# Altium PCB TestProject PCB V2.PcbDoc (part 2 of 2)
Units mil, origin at the board's own origin, x right, y up, seen from the top; angles counter-clockwise.
Board outline 2300 x 2780 mil, 2 copper layers (Top Layer, Bottom Layer), stack 61.811 mil thick; 69 components, 57 nets, 259 pads, 819 vias.
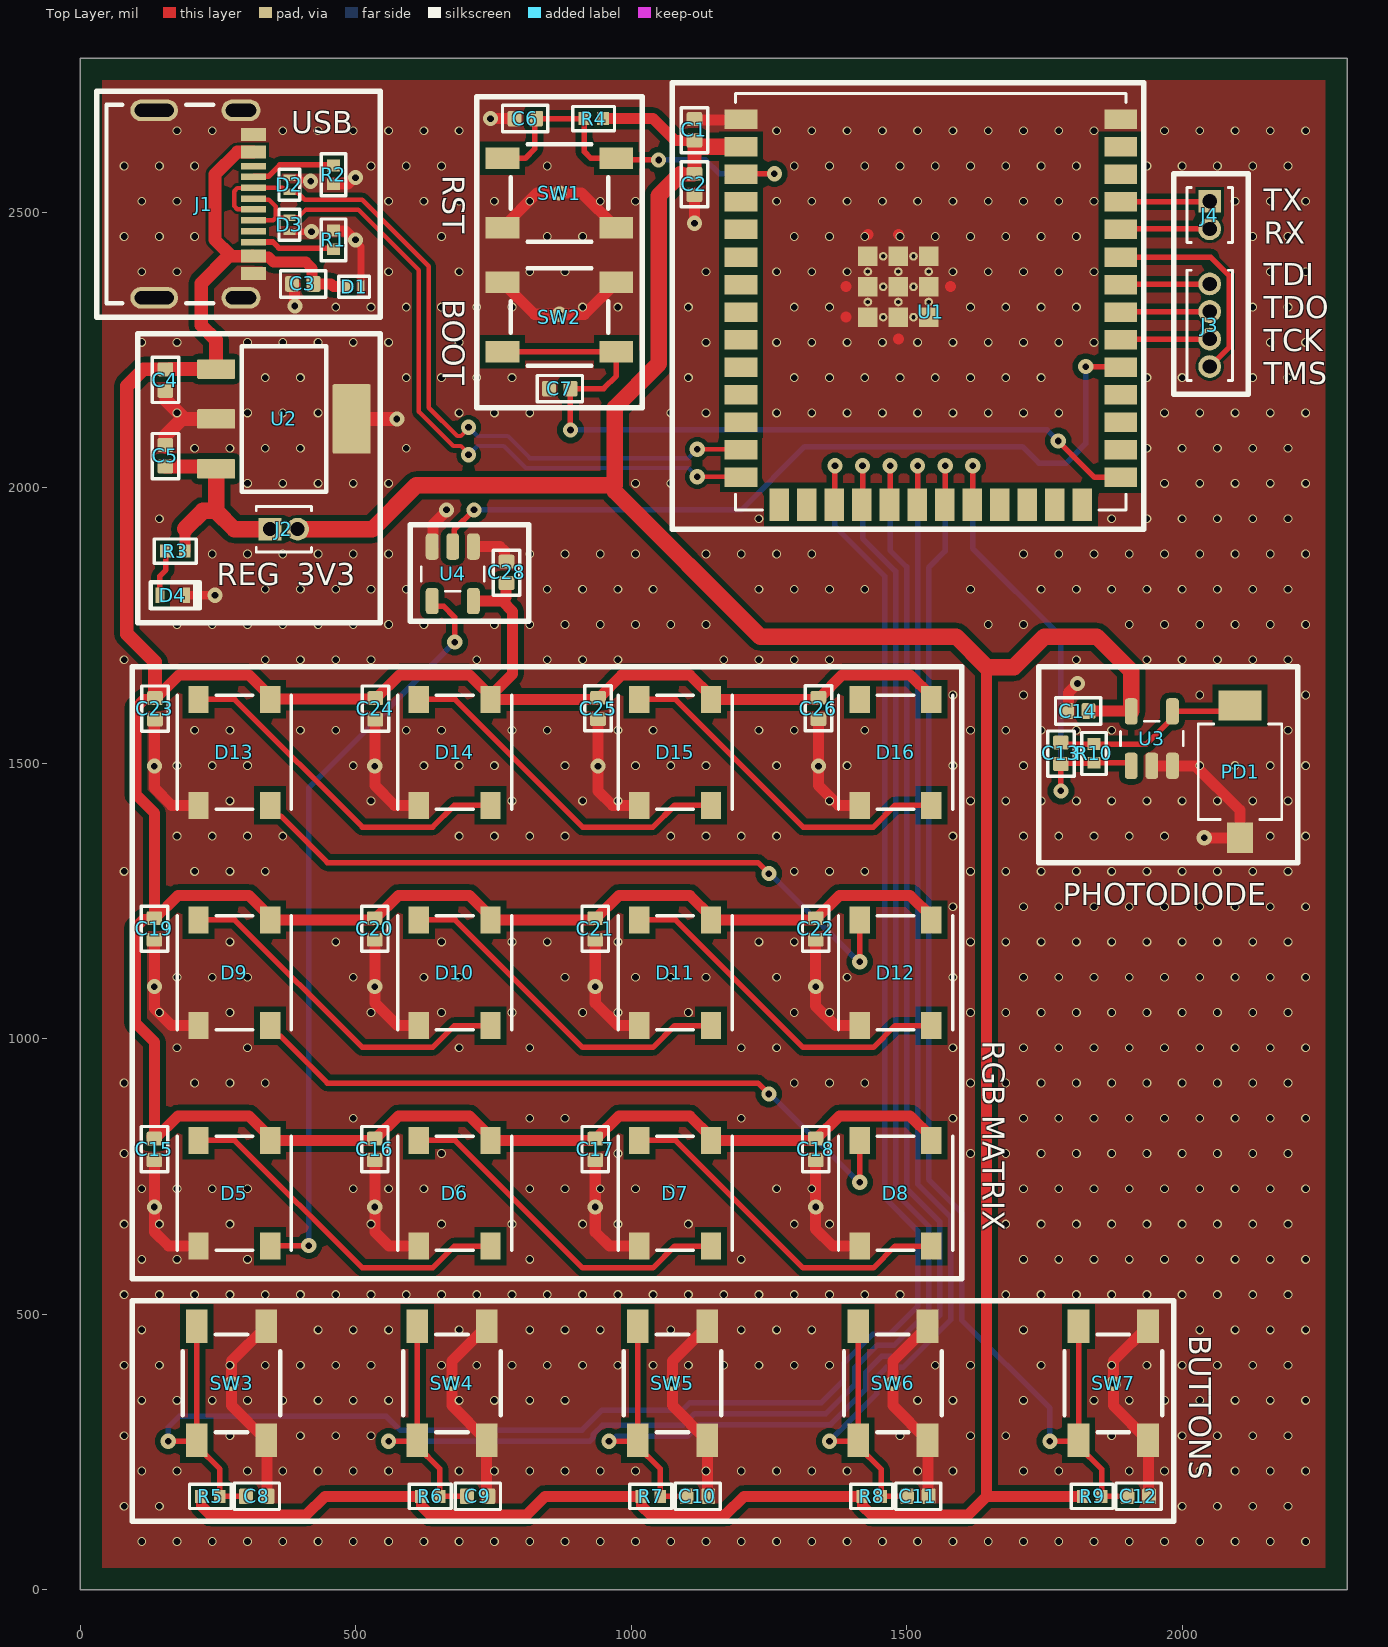
[diagram p0: Top Layer view]

## Via types
v1: diameter 16, hole 12, Top Layer to Bottom Layer, tented both sides, 760 vias
v2: diameter 27.56, hole 12, Top Layer to Bottom Layer, tented both sides, 59 vias

## Nets (pads, with @x,y where several pads share a name; then routed paths per layer and width w, separated by ;. In a path a pad name is that pad's centre, name@x,y a point inside that pad or via, vN(x,y) a via of type N, cw(c..) or ccw(c..) an arc to the next point about the centre after c; other vN are vias at no path point) (continued)
+5V: (continued)
  Top Layer w20: C15.2@130.83,823.17 130.83,821.6 133.43,819 C15.2 135,994.57 100.83,1028.74 100.83,1201.71 115.51,1216.4 132.4,1216.4 C19.2 ; C19.2@133.43,1219 135,1220.57 135,1410 101.22,1443.78 101.22,1600.61 116.51,1615.9 133.4,1615.9 C23.2 ; C15.2@136.57,819 178.07,860.5 306.46,860.5 344.96,822 D5.1 530.43,816 533.43,819 C16.2 536.57,819 578.07,860.5 706.46,860.5 744.96,822 D6.1 930.43,816 933.43,819 C17.2 936.57,819 978.07,860.5 1106.46,860.5 1144.96,822 D7.1 1330.43,816 1333.43,819 C18.2 1336.57,819 1378.07,860.5 1506.46,860.5 1544.96,822 D8.1 ; C19.2@136.57,1219 178.07,1260.5 306.46,1260.5 344.96,1222 D9.1 530.43,1216 533.43,1219 C20.2 536.57,1219 578.07,1260.5 706.46,1260.5 744.96,1222 D10.1 930.43,1216 933.43,1219 C21.2 936.57,1219 978.07,1260.5 1106.46,1260.5 1144.96,1222 D11.1 1330.43,1216 1333.43,1219 C22.2 1336.57,1219 1378.07,1260.5 1506.46,1260.5 1544.96,1222 D12.1 ; C23.2@137.57,1618.5 179.57,1660.5 306.46,1660.5 344.96,1622 D13.1 346.21,1617.25 534.75,1617.25 C24.2 537.57,1618.5 579.57,1660.5 706.46,1660.5 D14.1@744.96,1622 ; J1.B4A9@313.29,2422.06 J1.B4A9 316.65,2418.7 342.05,2418.7 350.75,2410 409.69,2410 421.4,2398.28 421.4,2372.6 C3.2 455,2370 460,2365 D1.2@480,2365 ; U4.5 766.31,1794.5 ; C28.2 772.73,1825.73 772.73,1800.92 766.31,1794.5 ; D16.1 1544.96,1622 1506.46,1660.5 1383.07,1660.5 1341.57,1619 C26.2 1338.43,1619 1335.43,1616 D15.1 1144.96,1622 1106.46,1660.5 983.07,1660.5 941.57,1619 C25.2 938.43,1619 935.43,1616 D14.1 D14.1@744.96,1622 ; D14.1@744.96,1622 785,1662.04 785,1775.81 766.31,1794.5
  Top Layer w23: 269.57,2420.51 J1.B4A9 ; 271.13,2423.87 245,2450 245,2568.98 285.51,2609.49 J1.A4B9
  Top Layer w25: C23.2 136,1684 85,1735 85,2185 115.28,2215.28 C4.2@155.28,2215.28 ; C4.2@155.55,2215.1 162.35,2215.1 162.8,2215.55 U2.1 246.97,2268.03 220,2295 220,2370.94 269.57,2420.51 271.13,2422.06
CHIP_PU: C6.1 R4.1 SW1.1 SW1.2 U1.3 | length 693
  Top Layer w10: SW1.1 807.99,2597.99 825,2615 825,2670 R4.1 915,2610 927.01,2597.99 SW1.2 976.34,2595 v2(1050,2595) ; U1.3 1200.63,2570 v2(1260,2570)
  Bottom Layer w10: v2(1050,2595) 1135,2595 1160,2570 v2(1260,2570)
GND: C1.1 C2.1 C3.1 C4.1 C5.1 C6.2 C7.1 C8.2 C9.2 C10.2 C11.2 C12.2 C14.1 C15.1 C16.1 C17.1 C18.1 C19.1 C20.1 C21.1 C22.1 C23.1 C24.1 C25.1 C26.1 C28.1 D1.1 D2.1 D3.1 D4.2 D5.3 D6.3 D7.3 D8.3 D9.3 D10.3 D11.3 D12.3 D13.3 D14.3 D15.3 D16.3 J1.A1B12 J1.B1A12 J1.S1 J1.S2 J1.S3 J1.S4 PD1.1 R1.1 R2.1 SW1.3 SW1.4 SW2.3 SW2.4 SW3.3 SW3.4 SW4.3 SW4.4 SW5.3 SW5.4 SW6.3 SW6.4 SW7.3 SW7.4 U1.1 U1.40 U1.41 U1.41_10 U1.41_11 U1.41_12 U1.41_13 U1.41_14 U1.41_15 U1.41_16 U1.41_17 U1.41_18 U1.41_19 U1.41_20 U1.41_21 U1.42 U1.43 U1.44 U1.45 U1.46 U1.47 U1.48 U1.49 U2.2 U2.4 U3.2 U3.3 U4.1 U4.3 | length 6290.8
  Top Layer w12: D3.1 v2(420,2465) ; D2.1 397.46,2562.5 402.01,2557.95 417.05,2557.95 v2(418.53,2556.47) ; v2@500,2447.95 510,2437.95 D1.1
  Top Layer w15: D4.2 v2(245,1805)
  Top Layer w20: C15.1@135,782.68 v2(135,695) 135,650 161,624 D5.3 ; C19.1@135,1182.68 v2(135,1095) 135,1055 166,1024 D9.3 ; C23.1@136,1582.18 135.5,1581.68 135.5,1495.5 v2(135,1495) 135,1455 166,1424 D13.3 ; C4.1@155,2178.68 C4.1@156.57,2178.68 ; 185,2125 190,2125 ; SW3.4 275,415.35 v2(275,375) 275,334.65 SW3.3 339,270.65 339,171 C8.2 ; C3.1@387.68,2370 388.84,2368.84 388.84,2331.16 v2(390,2330) ; R1.1 460.63,2466.38 481.58,2466.38 497.95,2450 v2(500,2450) v2@500,2447.95 ; R2.1 460.63,2551.61 486.58,2551.61 497.95,2562.99 v2(500,2562.99) ; C16.1@535,782.68 v2(535,695) 535,650 561,624 D6.3 ; C20.1@535,1182.68 v2(535,1095) 535,1065 576,1024 D10.3 ; C24.1@536,1582.18 535.5,1581.68 535.5,1495.5 v2(535,1495) 535,1460 571,1424 D14.3 ; U4.3 640.61,1894.94 640.61,1933.57 665,1957.95 v2(665,1960) ; U4.1 761.68,1893.32 770,1885 770,1865.92 772.6,1863.32 C28.1@774,1863.32 ; SW4.4 675,415.35 v2(675,375) 675,334.65 SW4.3 737.99,174.57 740.98,171.57 C9.2 ; v2(745,2670) C6.2 ; SW2.4 824.65,2315 v2(870,2315) 915.35,2315 SW2.3 ; SW1.3 829.65,2535 v2(870,2535) 910.35,2535 SW1.4 ; C17.1@935,782.68 v2(935,695) 935,650 961,624 D7.3 ; C21.1@935,1182.68 v2(935,1095) 935,1065 976,1024 D11.3 ; C25.1@940,1582.68 v2(940,1495) 940,1450 966,1424 D15.3 ; v2(1115,2480) C2.1@1115,2533.68 ; C1.1@1115,2666.32 1116.25,2667.57 1198.2,2667.57 U1.1 ; SW5.4 1075,415.35 v2(1075,375) 1075,334.65 SW5.3 1139,270.65 1139,171 C10.2 ; C18.1@1335,782.68 v2(1335,695) 1335,655 1366,624 D8.3 ; C22.1@1335,1182.68 v2(1335,1095) 1335,1060 1371,1024 D12.3 ; C26.1@1340,1582.68 v2(1340,1495) 1340,1460 1376,1424 D16.3 ; 1390,2310 1390.12,2309.88 ; 1390,2365 1390.06,2364.94 ; U1.47@1429.65,2309.88 U1.47 ; U1.44@1429.7,2364.94 U1.44 ; U1.41 U1.41@1429.88,2420.12 ; v1@1429.88,2459.88 v1@1430,2460 ; U1.48 U1.48@1484.94,2309.7 ; U1.42 U1.42@1484.94,2420.06 ; 1484.94,2270.06 1485,2270 ; v1@1484.94,2459.94 v1@1485,2460 ; SW6.4 1475,415.35 v2(1475,375) 1475,334.65 SW6.3 1539,270.65 1539,171 C11.2 ; U1.46 U1.46@1540.06,2364.94 ; 1579.94,2364.94 1580,2365 ; C14.1@1793.68,1595 1793.68,1628.68 v2(1810,1645) ; SW7.4 1875,415.35 v2(1875,375) 1875,334.65 SW7.3 1939,270.65 1939,171 C12.2 ; U3.2 U3.3 2024.41,1495.59 2105,1415 PD1.1 2104.96,1364.96 2090,1364.96 v2(2040,1365) v2(2040,1365)
  Top Layer w25: C5.1@155,2075 155,2095 185,2125 ; C4.1@156.57,2178.68 156.57,2158.43 190,2125 U2.2 ; U2.4 v2(575,2125)
  other v1: 112,88 176,88 240,88 304,88 368,88 432,88 496,88 560,88 624,88 688,88 752,88 816,88 880,88 944,88 1008,88 1072,88 1136,88 1200,88 1264,88 1328,88 1392,88 1456,88 1520,88 1584,88 1648,88 1712,88 1776,88 1840,88 1904,88 1968,88 2032,88 2096,88 2160,88 2224,88 80,152 144,152 2000,152 2064,152 2128,152 2192,152 112,216 176,216 304,216 368,216 432,216 496,216 560,216 688,216 752,216 816,216 880,216 944,216 1008,216 1136,216 1200,216 1264,216 1328,216 1392,216 1520,216 1584,216 1712,216 1776,216 1904,216 1968,216 2032,216 2096,216 2160,216 2224,216 80,280 272,280 400,280 464,280 528,280 1488,280 1616,280 1680,280 1872,280 2000,280 2064,280 2128,280 2192,280 112,344 176,344 240,344 304,344 368,344 432,344 496,344 560,344 688,344 752,344 816,344 880,344 1520,344 1584,344 1712,344 1840,344 1904,344 1968,344 2032,344 2096,344 2160,344 2224,344 80,408 144,408 272,408 336,408 400,408 464,408 528,408 656,408 720,408 784,408 848,408 912,408 976,408 1040,408 1104,408 1168,408 1232,408 1296,408 1360,408 1552,408 1616,408 1744,408 1872,408 1936,408 2000,408 2064,408 2128,408 2192,408 112,472 432,472 496,472 560,472 688,472 816,472 880,472 944,472 1072,472 1200,472 1264,472 1328,472 1712,472 2032,472 2096,472 2160,472 2224,472 80,536 144,536 208,536 272,536 336,536 400,536 464,536 528,536 592,536 656,536 720,536 784,536 848,536 912,536 976,536 1040,536 1104,536 1168,536 1232,536 1296,536 1360,536 1424,536 1488,536 1680,536 1744,536 1808,536 1872,536 1936,536 2000,536 2064,536 2128,536 2192,536 112,600 176,600 304,600 816,600 1200,600 1712,600 1776,600 1840,600 1904,600 1968,600 2032,600 2096,600 2160,600 2224,600 80,664 144,664 272,664 528,664 656,664 784,664 912,664 976,664 1104,664 1296,664 1360,664 1680,664 1744,664 1808,664 1872,664 1936,664 2000,664 2064,664 2128,664 2192,664 112,728 176,728 240,728 304,728 496,728 560,728 624,728 688,728 816,728 880,728 944,728 1008,728 1072,728 1264,728 1328,728 1712,728 1776,728 1840,728 1904,728 1968,728 2032,728 2096,728 2160,728 2224,728 80,792 656,792 976,792 1616,792 1680,792 1744,792 1808,792 1872,792 1936,792 2000,792 2064,792 2128,792 2192,792 496,856 816,856 880,856 1200,856 1584,856 1712,856 1776,856 1840,856 1904,856 1968,856 2032,856 2096,856 2160,856 2224,856 80,920 208,920 272,920 336,920 1296,920 1360,920 1424,920 1616,920 1680,920 1744,920 1808,920 1872,920 1936,920 2000,920 2064,920 2128,920 2192,920 176,984 304,984 688,984 816,984 1200,984 1264,984 1584,984 1712,984 1776,984 1840,984 1904,984 1968,984 2032,984 2096,984 2160,984 2224,984 144,1048 272,1048 528,1048 656,1048 784,1048 912,1048 976,1048 1104,1048 1296,1048 1360,1048 1616,1048 1680,1048 1744,1048 1808,1048 1872,1048 1936,1048 2000,1048 2064,1048 2128,1048 2192,1048 176,1112 240,1112 304,1112 496,1112 624,1112 688,1112 880,1112 1008,1112 1072,1112 1136,1112 1264,1112 1392,1112 1584,1112 1712,1112 1776,1112 1840,1112 1904,1112 1968,1112 2032,1112 2096,1112 2160,1112 2224,1112 272,1176 464,1176 656,1176 784,1176 848,1176 976,1176 1232,1176 1296,1176 1616,1176 1680,1176 1744,1176 1808,1176 1872,1176 1936,1176 2000,1176 2064,1176 2128,1176 2192,1176 1584,1240 1712,1240 1776,1240 1840,1240 1904,1240 1968,1240 2032,1240 2096,1240 2160,1240 2224,1240 80,1304 208,1304 272,1304 336,1304 1296,1304 1360,1304 1424,1304 1616,1304 1680,1304 1744,1304 1808,1304 1872,1304 1936,1304 2000,1304 2064,1304 2128,1304 2192,1304 176,1368 240,1368 304,1368 368,1368 688,1368 752,1368 816,1368 880,1368 1072,1368 1136,1368 1200,1368 1264,1368 1584,1368 1712,1368 1776,1368 1840,1368 1904,1368 1968,1368 2160,1368 2224,1368 272,1432 528,1432 784,1432 912,1432 976,1432 1360,1432 1616,1432 1680,1432 1744,1432 1808,1432 1872,1432 1936,1432 2000,1432 2064,1432 2128,1432 2192,1432 176,1496 240,1496 304,1496 496,1496 624,1496 688,1496 752,1496 880,1496 1008,1496 1072,1496 1136,1496 1264,1496 1392,1496 1584,1496 1712,1496 2032,1496 2096,1496 2160,1496 2224,1496 208,1560 272,1560 400,1560 464,1560 592,1560 656,1560 784,1560 848,1560 976,1560 1040,1560 1232,1560 1296,1560 1424,1560 1616,1560 1680,1560 1744,1560 1808,1560 1872,1560 2192,1560 1584,1624 1712,1624 2032,1624 2224,1624 80,1688 336,1688 400,1688 464,1688 528,1688 720,1688 848,1688 912,1688 976,1688 1168,1688 1232,1688 1296,1688 1360,1688 1808,1688 1936,1688 2000,1688 2064,1688 2128,1688 2192,1688 176,1752 240,1752 304,1752 368,1752 432,1752 496,1752 560,1752 624,1752 752,1752 816,1752 880,1752 944,1752 1008,1752 1072,1752 1136,1752 1648,1752 1712,1752 1904,1752 1968,1752 2032,1752 2096,1752 2160,1752 2224,1752 336,1816 400,1816 464,1816 528,1816 592,1816 848,1816 912,1816 976,1816 1040,1816 1232,1816 1296,1816 1360,1816 1424,1816 1616,1816 1744,1816 1808,1816 1872,1816 1936,1816 2000,1816 2064,1816 2128,1816 2192,1816 240,1880 304,1880 368,1880 432,1880 496,1880 560,1880 816,1880 880,1880 944,1880 1008,1880 1136,1880 1200,1880 1264,1880 1328,1880 1712,1880 1776,1880 1840,1880 1904,1880 1968,1880 2032,1880 2096,1880 2160,1880 2224,1880 144,1944 1232,1944 1872,1944 1936,1944 2000,1944 2064,1944 2128,1944 2192,1944 304,2008 368,2008 432,2008 496,2008 560,2008 1008,2008 1072,2008 1968,2008 2032,2008 2096,2008 2160,2008 2224,2008 208,2072 272,2072 336,2072 400,2072 592,2072 1936,2072 2000,2072 2064,2072 2128,2072 2192,2072 176,2136 304,2136 368,2136 432,2136 688,2136 752,2136 816,2136 1072,2136 1136,2136 1264,2136 1328,2136 1392,2136 1456,2136 1520,2136 1584,2136 1648,2136 1712,2136 1776,2136 1968,2136 2032,2136 2096,2136 2160,2136 2224,2136 336,2200 400,2200 592,2200 656,2200 720,2200 784,2200 1104,2200 1296,2200 1360,2200 1424,2200 1488,2200 1552,2200 1616,2200 1680,2200 1744,2200 1936,2200 2000,2200 2128,2200 2192,2200 112,2264 176,2264 304,2264 368,2264 432,2264 496,2264 560,2264 688,2264 1136,2264 1264,2264 1328,2264 1392,2264 1456,2264 1520,2264 1584,2264 1648,2264 1712,2264 1776,2264 1840,2264 2160,2264 2224,2264 464,2328 528,2328 592,2328 656,2328 720,2328 784,2328 912,2328 976,2328 1104,2328 1296,2328 1360,2328 1616,2328 1680,2328 1744,2328 1808,2328 2128,2328 2192,2328 112,2392 176,2392 560,2392 688,2392 816,2392 880,2392 1136,2392 1264,2392 1328,2392 1392,2392 1584,2392 1648,2392 1712,2392 1776,2392 1840,2392 2160,2392 2224,2392 80,2456 144,2456 208,2456 656,2456 848,2456 912,2456 1296,2456 1360,2456 1424,2456 1488,2456 1552,2456 1616,2456 1680,2456 1744,2456 1808,2456 2128,2456 2192,2456 112,2520 176,2520 560,2520 624,2520 688,2520 752,2520 816,2520 944,2520 1008,2520 1264,2520 1328,2520 1392,2520 1456,2520 1520,2520 1584,2520 1648,2520 1712,2520 1776,2520 1840,2520 2096,2520 2160,2520 2224,2520 80,2584 144,2584 208,2584 528,2584 592,2584 656,2584 848,2584 1296,2584 1360,2584 1424,2584 1488,2584 1552,2584 1616,2584 1680,2584 1744,2584 1808,2584 1936,2584 2000,2584 2064,2584 2128,2584 2192,2584 176,2648 240,2648 368,2648 432,2648 496,2648 560,2648 624,2648 688,2648 1264,2648 1328,2648 1392,2648 1456,2648 1520,2648 1584,2648 1648,2648 1712,2648 1776,2648 1840,2648 1968,2648 2032,2648 2096,2648 2160,2648 2224,2648
GPIO0: C7.2 SW2.1 SW2.2 U1.27 | length 1452.3
  Top Layer w10: SW2.2 SW2.1 973.35,2203.35 950,2180 C7.2 v2(890,2105) ; v2(1775,2085) 1841.18,2018.82 U1.27
  Bottom Layer w10: v2@890.21,2105 1755,2105 v2(1775,2085)
GPIO1: U1.39
GPIO2: U1.38
GPIO3: U1.15
GPIO4: U1.4
GPIO5: U1.5
GPIO6: U1.6
GPIO7: U1.7
GPIO8: U1.12
GPIO9: C8.1 R5.1 SW3.1 SW3.2 U1.17 | length 3601.2
  Top Layer w10: v2(160,270) 210.35,270 SW3.1 ; SW3.2 SW3.1 ; C8.1@303.68,170 R5.1 253.68,219.16 212.01,260.83 SW3.1 ; U1.17 1370,1970.67 v2(1370,2040)
  Bottom Layer w10: v2(160,270) 160,295 180,315 555.7,315 580.7,290 911.02,290 947.55,326.54 1093.26,326.54 1106.92,340.2 1345.35,340.2 1386.22,381.07 1386.22,411.77 1438.23,463.78 1468.93,463.78 1520,514.85 1520,651.86 1460,711.86 1460,1840 1370,1930 v2(1370,2040)
GPIO10: C9.1 R6.1 SW4.1 SW4.2 U1.18 | length 3183.4
  Top Layer w10: v2(560,270) 610.35,270 SW4.1 ; SW4.2 SW4.1 ; C9.1@704.66,170 R6.1 652.69,220.14 612.01,260.83 SW4.1 ; U1.18 1420,1970.67 v2(1420,2040)
  Bottom Layer w10: v2(560,270) 925.36,270 931.22,275.86 931.22,281.92 948.08,298.78 1093.78,298.78 1115.2,320.2 1353.64,320.2 1406.22,372.79 1406.22,403.49 1446.51,443.78 1477.21,443.78 1540,506.57 1540,660.15 1480,720.15 1480,1848.28 1420,1908.28 v2(1420,2040)
GPIO11: C10.1 R7.1 SW5.1 SW5.2 U1.19 | length 2780.4
  Top Layer w10: v2(960,270) 1010.35,270 SW5.1 SW5.2 ; SW5.1@1012.01,260.83 1052.69,220.14 R7.1 C10.1@1103.68,170 ; U1.19 1470,1970.67 v2(1470,2040)
  Bottom Layer w10: v2(960,270) 964.75,270 973.53,278.78 1102.06,278.78 1123.49,300.2 1361.92,300.2 1426.22,364.5 1426.22,395.21 1454.79,423.78 1485.5,423.78 1560,498.28 1560,668.43 1500,728.43 1500,1856.57 1470,1886.57 v2(1470,2040)
GPIO12: C11.1 R8.1 SW6.1 SW6.2 U1.20 | length 2403.1
  Top Layer w10: v2(1360,270) 1410.35,270 SW6.1 ; SW6.2 SW6.1 ; C11.1@1503.68,170 R8.1 1453.68,219.16 1412.01,260.83 SW6.1 ; U1.20 1520,1970.67 v2(1520,2040)
  Bottom Layer w10: v2(1360,270) 1446.22,356.22 1446.22,386.92 1463.08,403.78 1493.78,403.78 1580,490 1580,676.72 1520,736.72 v2(1520,2040)
GPIO13: C12.1 R9.1 SW7.1 SW7.2 U1.21 | length 2361.9
  Top Layer w10: U1.21 1570,1970.67 v2(1570,2040) ; v2(1760,270) 1810.35,270 SW7.1 SW7.2 ; SW7.1@1812.01,260.83 1853.68,219.16 R9.1 C12.1@1903.68,170
  Bottom Layer w10: v2(1570,2040) 1570,1885 1540,1855 1540,745 1600,685 1600,490 1760,330 v2(1760,270)
GPIO14: C13.2 R10.2 U1.22 U3.1 | length 906.6
  Top Layer w10: U1.22 1620,1970.67 v2(1620,2040) ; v2(1780,1450) C13.2 1781.15,1499.83 1838.85,1499.83 R10.2 1902.2,1500.98 U3.1
  Bottom Layer w10: v2(1620,2040) 1620,1890 1780,1730 v2(1780,1450)
GPIO15: U1.8
GPIO16: U1.9
GPIO17: U1.10
GPIO18: U1.11
GPIO21: U1.23
GPIO35: U1.28
GPIO36: U1.29
GPIO37: U1.30
GPIO38: U1.31 U4.2 | length 1471.1
  Top Layer w10: U4.2 678.98,1895.91 678.98,1923.98 v2(715,1960) ; v2(1825,2220) 1887.24,2220 U1.31
  Bottom Layer w10: v2(715,1960) 1200,1960 1315,2075 1710,2075 1740,2045 1790,2045 1825,2080 v2(1825,2220)
GPIO39: J3.3 U1.32 | length 162.1
  Top Layer w10: U1.32 1889.02,2269.41 2049.41,2269.41 J3.3
GPIO40: J3.2 U1.33 | length 162.1
  Top Layer w10: U1.33@1889.02,2319.41 J3.2@2049.41,2319.41
  Top Layer w20: U1.33 U1.33@1889.02,2319.41 ; J3.2@2049.41,2319.41 J3.2
GPIO41: J3.1 U1.34 | length 162.1
  Top Layer w10: U1.34@1889.02,2369.41 J3.1@2049.41,2369.41
  Top Layer w20: U1.34 U1.34@1889.02,2369.41 ; J3.1@2049.41,2369.41 J3.1
GPIO42: J3.4 U1.35 | length 391.2
  Top Layer w10: U1.35 2051.63,2418.82 2085.67,2384.77 2085.67,2255.23 2050.44,2220 J3.4
GPIO45: U1.26
GPIO46: U1.16
GPIO47: U1.24
GPIO48: U1.25
NetC13_1: C13.1 PD1.2 R10.1 U3.4 | length 344.1
  Top Layer w10: C13.1@1780,1535 R10.1 1935.2,1535 1982.4,1582.2 U3.4 2084.33,1594.41 PD1.2@2090,1600.08
NetD4_1: D4.1 R3.1 | length 84.5
  Top Layer w10: D4.1 145,1840 155.98,1850.98 R3.1
NetD5_2: D5.2 D6.4 | length 642.2
  Top Layer w10: D5.2 280.75,816 512.25,584.5 639.75,584.5 679.25,624 D6.4
NetD6_2: D6.2 D7.4 | length 642.2
  Top Layer w10: D6.2 680.75,816 912.25,584.5 1039.75,584.5 1079.25,624 D7.4
NetD7_2: D7.2 D8.4 | length 642.2
  Top Layer w10: D7.2 1080.75,816 1312.25,584.5 1439.75,584.5 1479.25,624 D8.4
NetD9_2: D9.2 D10.4 | length 642.2
  Top Layer w10: D9.2 280.75,1216 512.25,984.5 639.75,984.5 679.25,1024 D10.4
NetD10_2: D10.2 D11.4 | length 642.2
  Top Layer w10: D10.2 680.75,1216 912.25,984.5 1039.75,984.5 1079.25,1024 D11.4
NetD11_2: D11.2 D12.4 | length 642.2
  Top Layer w10: D11.2 1080.75,1216 1312.25,984.5 1439.75,984.5 1479.25,1024 D12.4
NetD13_2: D13.2 D14.4 | length 642.2
  Top Layer w10: D13.2 280.75,1616 512.25,1384.5 639.75,1384.5 679.25,1424 D14.4
NetD14_2: D14.2 D15.4 | length 642.2
  Top Layer w10: D14.2 680.75,1616 912.25,1384.5 1039.75,1384.5 1079.25,1424 D15.4
NetD15_2: D15.2 D16.4 | length 642.2
  Top Layer w10: D15.2 1080.75,1616 1312.25,1384.5 1439.75,1384.5 1479.25,1424 D16.4
NetJ1_A5: J1.A5 R2.2 | length 154.6
  Top Layer w10: J1.A5 315.75,2565.12 341.9,2565.12 362.79,2586 459,2586 R2.2
NetJ1_B5: J1.B5 R1.2 | length 150.6
  Top Layer w10: J1.B5 350,2446.1 361.1,2435 457.99,2435 R1.2
ROW_1: D5.4 U4.4 | length 1375
  Top Layer w10: D5.4 345.96,625 v2(415,625) ; U4.4 639,1791.8 645.55,1785.24 659.76,1785.24 680,1765 v2(680,1720)
  Bottom Layer w10: v2(415,625) 415,1455 v2(680,1720)
ROW_2: D8.2 D9.4 | length 1267.2
  Top Layer w10: D9.4 344.96,1018 358.46,1004.5 364.46,1004.5 448.96,920 1230,920 v2(1250,900) ; v2(1415,740) D8.2 D8.2
  Bottom Layer w10: v2(1250,900) 1252.5,900 1412.5,740 v2(1415,740)
ROW_3: D12.2 D13.4 | length 1267.2
  Top Layer w10: D13.4 344.96,1418 358.46,1404.5 364.46,1404.5 448.96,1320 1230,1320 v2(1250,1300) ; v2(1415,1140) D12.2 D12.2
  Bottom Layer w10: v2(1250,1300) 1252.5,1300 1412.5,1140 v2(1415,1140)
U0RXD: J4.2 U1.36 | length 162.1
  Top Layer w10: U1.36 1889.61,2470 J4.2
U0TXD: J4.1 U1.37 | length 162.1
  Top Layer w10: U1.37 2048.82,2518.82 J4.1
USB_N: D2.2 J1.A7 J1.B7 U1.13 | length 1358.4
  Top Layer w8: J1.A7 314.37,2505.63 285.56,2505.63 279.7,2511.49 279.7,2538.19 285.56,2544.05 314.37,2544.05 J1.B7 367.97,2544.53 375,2537.5 D2.2 ; D2.2@383.56,2537.5 385.56,2535.5 395.31,2535.5 407.81,2523 512.21,2523 633,2402.21 633,2145.54 684.54,2094 691.17,2094 705,2107.83 v2(705,2110) ; v2(1120,2070) 1198.27,2070 U1.13
  Bottom Layer w8: v2(705,2110) 721,2094 776.46,2094 816.46,2054 1104,2054 v2(1120,2070)
USB_P: D3.2 J1.A6 J1.B6 U1.14 | length 1326.5
  Top Layer w8: J1.A6 316.62,2523.06 342.45,2523.06 355,2510.51 355,2490 ; J1.B6@316.12,2486.75 J1.B6 350.47,2485.47 355,2490 ; J1.A6@331.57,2524.84 J1.A6@333.48,2522.94 ; D3.2 355,2490 ; D3.2@383.56,2490 385.05,2491.49 396.49,2491.49 410,2505 504.75,2505 615,2394.75 615,2138.09 677.09,2076 691.17,2076 705,2062.17 v2(705,2060) ; v2(1120,2020) 1198.27,2020 U1.14
  Bottom Layer w8: v2(705,2060) 721,2076 769,2076 809,2036 1104,2036 v2(1120,2020)
pads on no net: D16.2 J1.A8 J1.B8

## Polygon pours and split planes (outlines as drawn)
GND on Top Layer "GND_L01_P002" (solid, pour order 2): 40,40 2260,40 2260,2740 40,2740
GND on Top Layer "GND_L01_P000" (solid, pour order 0): 1375,2255 1595,2255 1595,2310 1595,2475 1485,2475 1375,2475
GND on Bottom Layer "GND_L02_P001" (solid, pour order 1): 40,40 2260,40 2260,2740 40,2740

## Silkscreen, mask and mechanical layers (free items; w line width, h text height)
Top Overlay:
  lines w10: 30,2310 545,2310 545,2720 30,2720 30,2310 ; 95,125 1985,125 1985,525 95,525 95,125 ; 95,565 1600,565 1600,1675 95,1675 95,565 ; 105,1755 545,1755 545,2280 105,2280 105,1755 ; 599,1758.32 599,1933.32 814,1933.32 814,1758.32 599,1758.32 ; 720,2145 1020,2145 1020,2710 720,2710 720,2145 ; 1075,1925 1930,1925 1930,2735 1075,2735 1075,1925 ; 1740,1320 2210,1320 2210,1675 1740,1675 1740,1320 ; 1985,2170 2120,2170 2120,2570 1985,2570 1985,2170
  text "USB" at 383,2643 h40
  text "RST" at 658,2567 h40 r270
  text "TX" at 2148,2503 h40
  text "RX" at 2148,2443 h40
  text "TDI" at 2148,2368 h40
  text "BOOT" at 658,2342 h40 r270
  text "TDO" at 2148,2308 h40
  text "TCK" at 2148,2248 h40
  text "TMS" at 2148,2188 h40
  text "REG" at 248,1823 h40
  text "3V3" at 393,1823 h40
  text "PHOTODIODE" at 1783,1243 h40
  text "RGB MATRIX" at 1638,997 h40 r270
  text "BUTTONS" at 2013,462 h40 r270
Board Shape:
  the board outline again, w20